# Altium PCB Node_PCB.PcbDoc
Units mm, origin at the board's own origin, x right, y up, seen from the top; angles counter-clockwise.
Board outline 90.25 x 90.17 mm, 2 copper layers (Top Layer, Bottom Layer); 52 components, 54 nets, 196 pads, 8 vias.
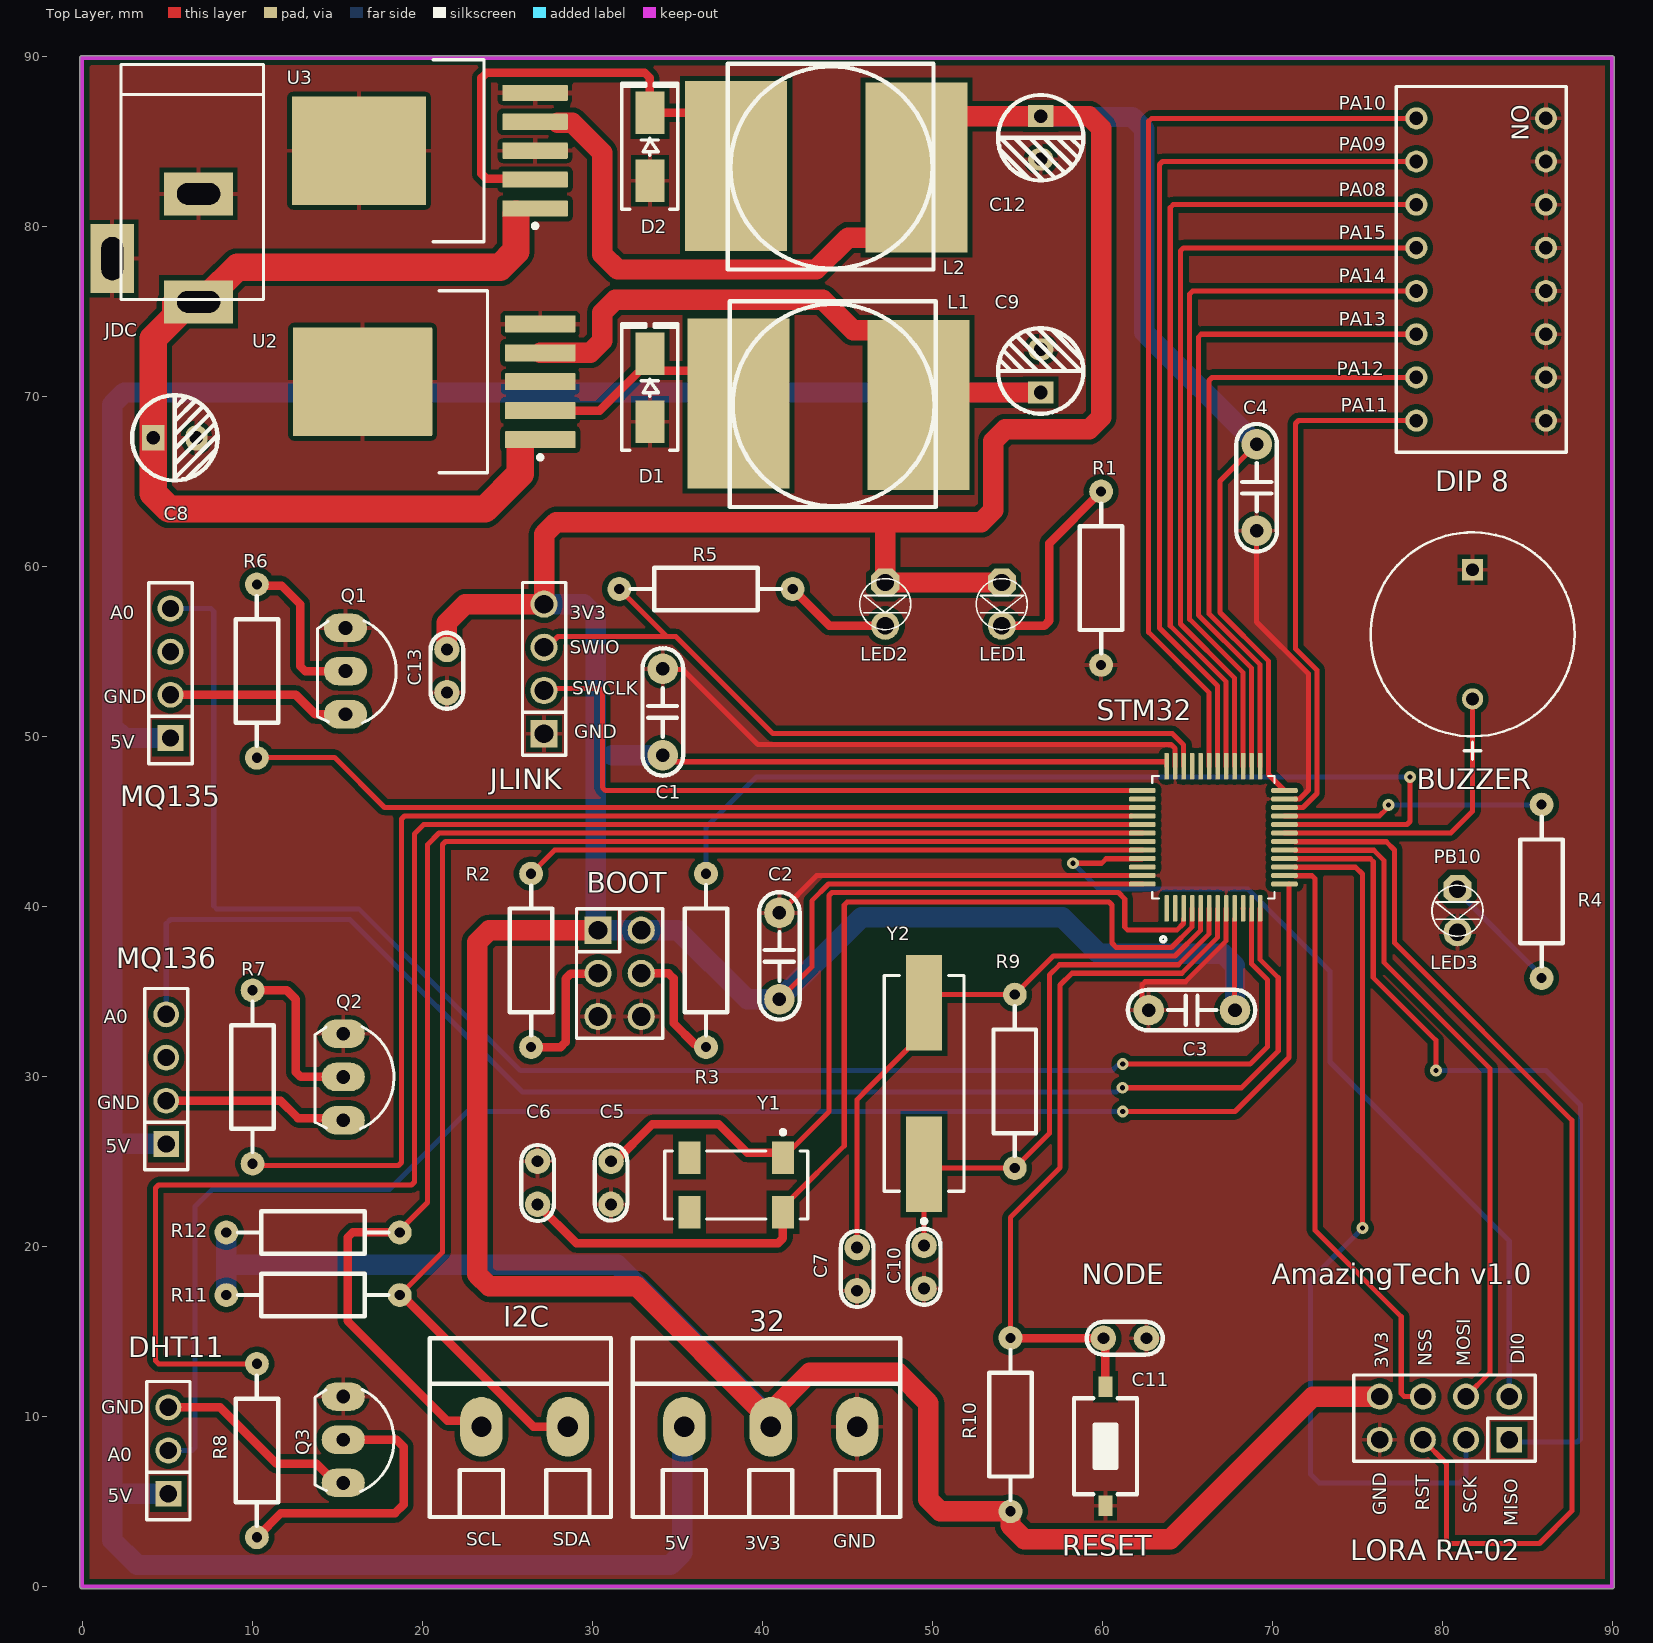
[diagram p0: Top Layer view]
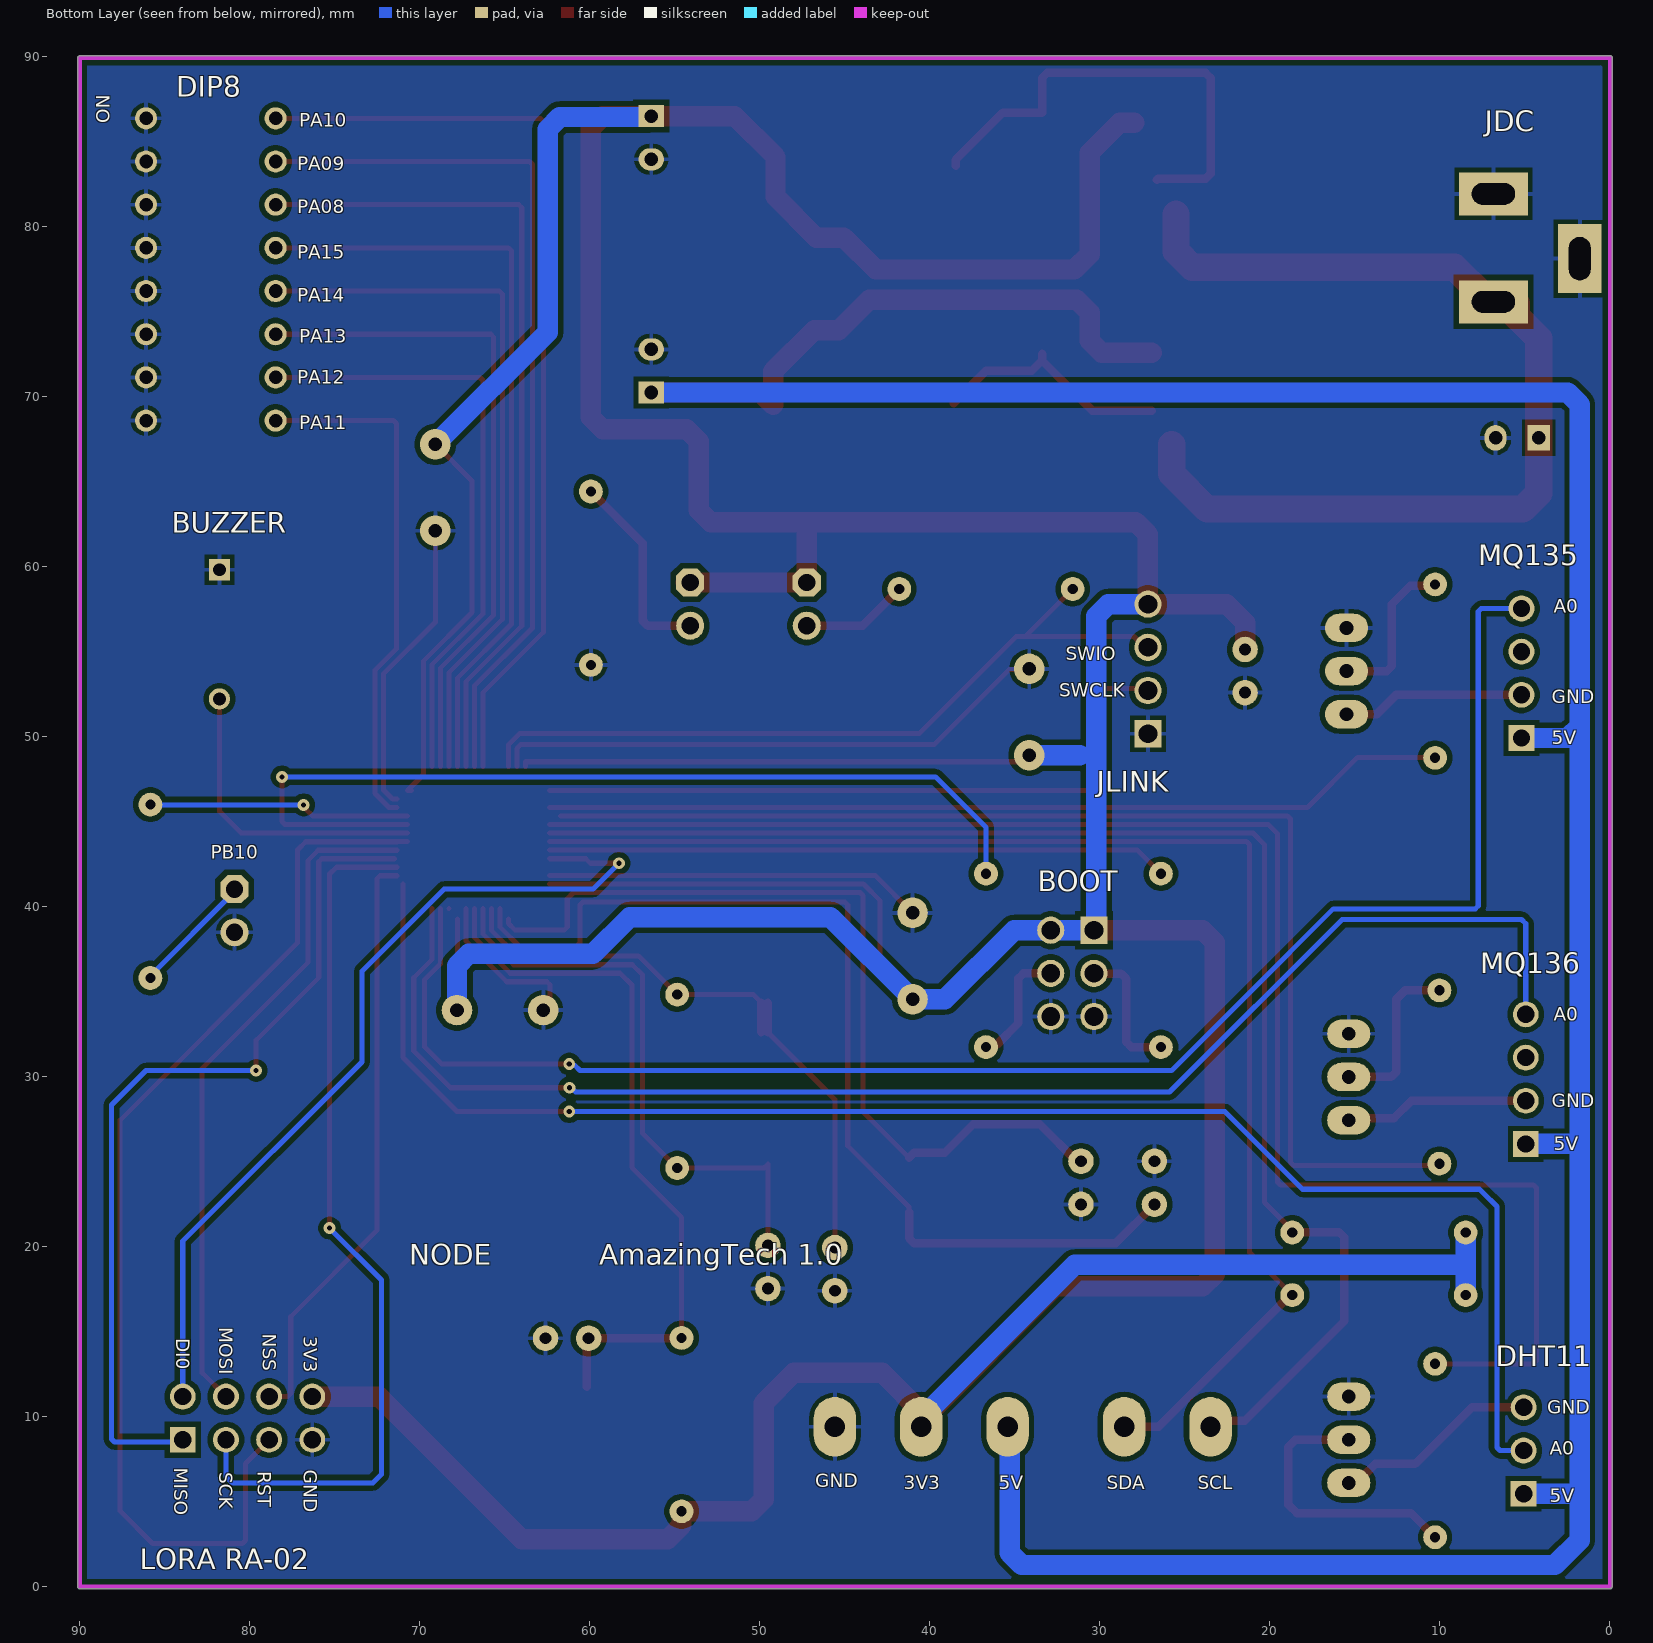
[diagram p1: Bottom Layer view, seen from below]

## Layer stack, top to bottom
Top Solder: solder mask 0.0102, Solder Resist, Dk 3.5
Top Layer: signal copper 0.0356
Dielectric 1: dielectric 0.32, FR-4, Dk 4.8
Bottom Layer: signal copper 0.0356
Bottom Solder: solder mask 0.0102, Solder Resist, Dk 3.5

## Board outline
0,-0.127 cw(c0,0) -0.127,0 -0.127,89.916 cw(c0,89.916) 0,90.043 90,90.027 cw(c90,89.9) 90.127,89.9 90.127,0 cw(c90,0) 90,-0.127

## Design rules (kind name [scope] priority, off if disabled: settings)
Clearance [All] p1: gap=0.31 ignorepadtopadclearanceinfootprint=FALSE
PolygonConnect [All] p1: connectstyle=Relief reliefconductorwidth=0.3 reliefentries=4 polygonreliefangle="90 Angle" airgapwidth=0.254
RoutingVias RoutingVias_1 [All] p1: holewidth=0.4 width=0.7 viastyle="Through Hole" minholewidth=0.4 minwidth=0.7 maxholewidth=0.4 maxwidth=0.7
SolderMaskExpansion [All] p1: expansion=0.102 istentingtop=FALSE
Width GND [InNet('GND')] p1: maxlimit=1.6 minlimit=0.3 preferedwidth=1.2
Width 3V3 [InNet('3V3')] p2: maxlimit=1.6 minlimit=0.3 preferedwidth=1.2
Width 5V [InNet('5V')] p3: maxlimit=1.6 minlimit=0.5 preferedwidth=1.2
Width 12V [InNet('12V')] p4: maxlimit=2 minlimit=1.2 preferedwidth=1.6
Width [All] p5: maxlimit=0.5 minlimit=0.3 preferedwidth=0.5
30 further rules are at their usual default settings.

## Components (designator, comment, footprint, x,y, rotation, side; value= is the part's Value field where it differs from the comment)
32 "KF128-3P" KF128-5.08-3P 35.433,9.398 r0 top (schematic designator J2)
BOOT "Header 3X2" "JP 2x3 DT" 31.623,36.068 r270 top (schematic designator P1)
BUZZER "Buzzer" FP-MCKPX-G1203A-K4056-MFG 81.788,56.007 r270 top (schematic designator LS1)
C1 "100nF" "tu tantalum dip5.08" 34.163,51.435 r90 top
C2 "100nF" "tu tantalum dip5.08" 41.021,37.084 r90 top
C3 "100nF" "tu tantalum dip5.08" 65.278,33.909 r180 top
C4 "100nF" "tu tantalum dip5.08" 69.088,64.643 r270 top
C5 "20pF" "tu gom" 31.115,23.749 r270 top
C6 "20pF" "tu gom" 26.797,23.749 r90 top
C7 "20pF" "tu gom" 45.593,18.669 r270 top
C8 "100uF" "tu hoa 5mm" 5.461,67.564 r0 top
C9 "100uF" "tu hoa 5mm" 56.388,71.501 r90 top
C10 "20pF" "tu gom" 49.53,18.796 r270 top
C11 "20pF" "tu gom" 61.341,14.605 r0 top
C12 "100uF" "tu hoa 5mm" 56.388,85.217 r270 top
C13 "20pF" "tu gom" 21.463,53.848 r270 top
D1 "SS34" "DIODE SMA" 33.401,70.517 r90 top
D2 "SS34" "DIODE SMA" 33.401,84.687 r90 top
DHT11 "DHT11" "JP 1x3 CT" 5.08,5.461 r90 top (schematic designator JP3)
"DIP 8" "418117270908" 418117270908 82.296,77.47 r270 top (schematic designator SW1)
I2C "KF128-2P" KF128-5.08-2P 23.495,9.398 r0 top (schematic designator J1)
JDC "Jac DC" DC-IN 4.318,78.74 r270 top (schematic designator JDC?)
JLINK "SWD" "JP 1x4 DT" 27.178,50.165 r90 top (schematic designator P2)
L1 "100uH - 3A SMD" "Cuon Cam 12x12x10" 50.208,63.496 r90 top
L2 "100uH - 3A SMD" "Cuon Cam 12x12x10" 50.081,77.466 r90 top
LED1 "LED 3mm" LED-3MM-RED 54.102,59.055 r270 top
LED2 "LED 3mm" LED-3MM-GREEN 47.244,59.055 r270 top
LED3 "LED 3mm" LED-3MM-RED 80.899,41.021 r270 top
"LORA RA-02" "Header - Lora" "JP 2x4 CT" 80.137,9.906 r180 top (schematic designator JP4)
MQ135 "MQ135" "JP 1x4 CT" 5.207,49.911 r90 top (schematic designator JP1)
MQ136 "MQ136" "JP 1x4 CT" 4.953,26.035 r90 top (schematic designator JP2)
Q1 "?" TO92 15.494,53.848 r270 top value=C9014
Q2 "?" TO92 15.367,29.972 r270 top value=C9014
Q3 "?" TO92 15.367,8.636 r270 top value=C9014
R1 "510R" "tro vach 1/4w" 59.944,59.309 r270 top
R2 "100k" "tro vach 1/4w" 26.416,36.83 r270 top
R3 "100k" "tro vach 1/4w" 36.703,36.83 r90 top
R4 "200R" "tro vach 1/4w" 85.852,40.894 r270 top
R5 "510R" "tro vach 1/4w" 36.703,58.674 r180 top
R6 "220R" "tro vach 1/4w" 10.287,53.848 r90 top
R7 "220R" "tro vach 1/4w" 10.033,29.972 r90 top
R8 "220R" "tro vach 1/4w" 10.287,8.001 r270 top
R9 "1M" "tro vach 1/4w" 54.864,29.718 r90 top
R10 "10k" "tro vach 1/4w" 54.61,9.525 r270 top
R11 "1.5k" "tro vach 1/4w" 13.589,17.145 r0 top
R12 "1.5k" "tro vach 1/4w" 13.589,20.828 r0 top
RESET "Nut Nhan 2 Chan SMD 3x6x2.5" "Nut Nhan 2 Chan SMD 3x6x2.5" 60.198,8.255 r90 top (schematic designator BT1)
STM32 "STM32F103C8T6" QFP50P900X900X160-48N 66.548,44.069 r90 top (schematic designator U1)
U2 "LM2576S-5.0/NOPB" KTT0005B_N 20.701,70.866 r180 top
U3 "LM2576SX-3.3/NOPB" KTT0005B_L 20.447,84.455 r180 top
Y1 "32.768K" FP-ABS25-MFG 38.481,23.622 r180 top
Y2 "8MHz" ABRA-ABLS-14.7456MHZ-B2-T_V 49.53,29.591 r90 top

## Footprints (in the part's own frame and the unit in brackets; to place one, negate y for a bottom-side part, rotate by r counter-clockwise, add the part's x,y. Pads: shape width x height; smd on the part's side, far side on the other; paste and mask are expansions set on the pad)
418117270908 [mm] "2.54 mm compact THT with raised actuator, 8p"
  round 1.3 hole 0.8: 1(-8.89,-3.81) 2(-6.35,-3.81) 3(-3.81,-3.81) 4(-1.27,-3.81) 5(1.27,-3.81) 6(3.81,-3.81) 7(6.35,-3.81) 8(8.89,-3.81) 9(8.89,3.81) 10(6.35,3.81) 11(3.81,3.81) 12(1.27,3.81) 13(-1.27,3.81) 14(-3.81,3.81) 15(-6.35,3.81) 16(-8.89,3.81)
  silkscreen extent -10.76,-5 10.76,5, body extent -10.66,-4.95 10.66,4.95, height 6.9
ABRA-ABLS-14.7456MHZ-B2-T_V [mm] "SMD, 2-Leads, Body 11.4x4.7mm"
  rect 5.6x2.1 smd: 1(-4.75,0) 2(4.75,0)
  silkscreen extent -8.22,-2.35 6.35,2.35, body extent -6.35,-2.35 6.35,2.35, height 4.16
"Cuon Cam 12x12x10" [mm] "Cuon Cam 12x12x10"
  rect 10x6 smd: 1(6.1,11.6) 2(6,1)
  silkscreen extent 0,0 12.1,12.1, body extent 0.1,-0.2 12.1,12.14, height 7.51
DC-IN [mil] "Jac DC input"
  rect 100x160 hole 50 slot 100 at 90 deg: 1(125,100) 2(-125,100)
  rect 160x100 hole 50 slot 100 at 0 deg: 3(25,-100)
  silkscreen extent -425,-80 120,250, body extent -410,-105 134,269, height 434
"DIODE SMA" [mm] "SMA"
  rect 2.5x1.7 smd: 1(-2,0) 2(2,0)
  silkscreen extent -3.68,-1.65 3.75,1.65, body extent -2.6,-1.37 2.6,1.37, height 2.4
FP-ABS25-MFG [mm]
  rect 1.3x1.9 smd paste+0 mask+0: 1(-2.75,-1.6) 2(2.75,-1.6) 3(2.75,1.6) 4(-2.75,1.6)
  silkscreen extent -4.2,-3.22 4.2,2, body extent -4.3,-2.65 4.3,2.65, height 0.25
FP-MCKPX-G1203A-K4056-MFG [mm]
  rect 1.25x1.25 hole 0.75 paste-1000 mask+0: 1(-3.8,0)
  round 1.25 hole 0.75 paste-1000 mask+0: 2(3.8,0)
  silkscreen extent -6,-6 7.35,6, body extent -6.1,-6.1 6.1,6.1, height 0.25
"JP 1x3 CT" [mm]
  rect 1.52x1.52 hole 1.02: 1(0,0)
  round 1.52 hole 1.02: 2(2.54,0) 3(5.08,0)
  silkscreen extent -1.52,-1.27 6.6,1.27, body extent -1.52,-1.25 6.6,1.25, height 8.51
"JP 1x4 CT" [mm]
  rect 1.52x1.52 hole 1.02: 1(0,0)
  round 1.52 hole 1.02: 2(2.54,0) 3(5.08,0) 4(7.62,0)
  silkscreen extent -1.52,-1.27 9.14,1.27, body extent -1.52,-1.25 9.14,1.25, height 8.51
"JP 1x4 DT" [mm] "4 pins, 1 row, straight, gold plating"
  rect 1.6x1.6 hole 1.1: 1(0,0)
  round 1.6 hole 1.1: 2(2.54,0) 3(5.08,0) 4(7.62,0)
  silkscreen extent -1.27,-1.27 8.89,1.27, body extent -1.27,-1.27 8.89,1.27, height 8.54
"JP 2x3 DT" [mm]
  rect 1.6x1.6 hole 1.1: 1(-2.54,-1.27)
  round 1.6 hole 1.1: 2(0,-1.27) 3(2.54,-1.27) 4(2.54,1.27) 5(0,1.27) 6(-2.54,1.27)
  silkscreen extent -3.81,-2.54 3.81,2.54, body extent -3.81,-2.54 3.81,2.54, height 8.55
"JP 2x4 CT" [mm] "8 pins, dual row, straight, gold plating"
  rect 1.52x1.52 hole 1.02: 1(-3.81,1.27)
  round 1.52 hole 1.02: 2(-1.27,1.27) 3(1.27,1.27) 4(3.81,1.27) 5(3.81,-1.27) 6(1.27,-1.27) 7(-1.27,-1.27) 8(-3.81,-1.27)
  silkscreen extent -5.33,-2.54 5.33,2.54, body extent -5.33,-2.54 5.33,2.54, height 8.51
KF128-5.08-2P [mm] "ÂÝ¶¤Ê½½ÓÏß¶Ë×Ó£¬½Å¾à5.08mm"
  oval 2.5x3.5 hole 1.2: 1(0,0) 2(5.08,0)
  silkscreen extent -3.05,-5.31 7.62,5.21, body extent -3.05,-5.38 7.61,5.12, height 14.15
KF128-5.08-3P [mm] "ÂÝ¶¤Ê½½ÓÏß¶Ë×Ó£¬½Å¾à5.08mm"
  oval 2.5x3.5 hole 1.2: 1(0,0) 2(5.08,0) 3(10.16,0)
  silkscreen extent -3.05,-5.31 12.7,5.21, body extent -3.05,-5.38 12.69,5.12, height 14.15
KTT0005B_L [mm] "DPAK, 5-Leads, Body 10.65x9.65mm, Pitch 1.7mm, IPC High Density"
  rrect11% 3.85x0.95 smd: 1(-6.2,3.4) 2(-6.2,1.7) 3(-6.2,0) 4(-6.2,-1.7) 5(-6.2,-3.4)
  rrect2% 7.9x6.4 smd: 6(4.15,0)
  silkscreen extent -6.33,-5.35 -0.2,5.35, body extent -3.2,-5.32 6.45,5.33, height 4.83
KTT0005B_N [mm] "DPAK, 5-Leads, Body 10.65x9.65mm, Pitch 1.7mm, IPC Medium Density"
  rrect10% 4.15x1 smd: 1(-6.25,3.4) 2(-6.25,1.7) 3(-6.25,0) 4(-6.25,-1.7) 5(-6.25,-3.4)
  rrect2% 8.2x6.4 smd: 6(4.2,0)
  silkscreen extent -6.38,-5.35 -0.3,5.35, body extent -3.15,-5.32 6.5,5.33, height 4.83
LED-3MM-GREEN [mil]
  oct 65x65 hole 40: 1(0,0)
  round 65 hole 40: 2(100,0)
  silkscreen extent -9,-59 109,59, body extent -15,-70 112,60, height 182
LED-3MM-RED [mil]
  oct 65x65 hole 40: 1(0,0)
  round 65 hole 40: 2(100,0)
  silkscreen extent -9,-59 109,59, body extent -27,-77 117,80, height 181
"Nut Nhan 2 Chan SMD 3x6x2.5" [mm] "Switch SMD type"
  rect 1.2x0.8 smd: 1(-3.5,0) 2(3.5,0)
  silkscreen extent -2.82,-1.85 2.82,1.85, body extent -3.05,-1.85 3.05,1.85, height 2.5
QFP50P900X900X160-48N [mm]
  rrect50% 1.56x0.28 smd: 1(-4.18,2.75) 2(-4.18,2.25) 3(-4.18,1.75) 4(-4.18,1.25) 5(-4.18,0.75) 6(-4.18,0.25) 7(-4.18,-0.25) 8(-4.18,-0.75) 9(-4.18,-1.25) 10(-4.18,-1.75) 11(-4.18,-2.25) 12(-4.18,-2.75) 25(4.18,-2.75) 26(4.18,-2.25) 27(4.18,-1.75) 28(4.18,-1.25) 29(4.18,-0.75) 30(4.18,-0.25) 31(4.18,0.25) 32(4.18,0.75) 33(4.18,1.25) 34(4.18,1.75) 35(4.18,2.25) 36(4.18,2.75)
  rrect50% 0.28x1.56 smd: 13(-2.75,-4.18) 14(-2.25,-4.18) 15(-1.75,-4.18) 16(-1.25,-4.18) 17(-0.75,-4.18) 18(-0.25,-4.18) 19(0.25,-4.18) 20(0.75,-4.18) 21(1.25,-4.18) 22(1.75,-4.18) 23(2.25,-4.18) 24(2.75,-4.18) 37(2.75,4.18) 38(2.25,4.18) 39(1.75,4.18) 40(1.25,4.18) 41(0.75,4.18) 42(0.25,4.18) 43(-0.25,4.18) 44(-0.75,4.18) 45(-1.25,4.18) 46(-1.75,4.18) 47(-2.25,4.18) 48(-2.75,4.18)
  silkscreen extent -6.15,-3.6 3.6,3.6, body extent -4.5,-4.5 4.5,4.5, height 1.6
TO92 [mil] "TO-92"
  oval 66x100 hole 32: 1(-100,0) 2(0,0) 3(100,0)
  silkscreen extent -117,-65 120,118, body extent -109,-66 109,95, height 245
"tro vach 1/4w" [mm]
  round 1.4 hole 0.6: 1(-5.1,0) 2(5.1,0)
  silkscreen extent -4.39,-1.25 4.42,1.25, body extent -5.38,-1.2 5.38,1.2, height 2.41
"tu gom" [mm] "Tu gom mini"
  round 1.5 hole 0.7: 1(-1.27,0) 2(1.27,0)
  silkscreen extent -2.25,-0.97 2.22,0.97, body extent -2.92,-0.85 2.92,0.85, height 6.12
"tu hoa 5mm" [mm]
  rect 1.3x1.5 hole 0.8: 1(-1.27,0)
  oval 1.3x1.5 hole 0.8: 2(1.27,0)
  silkscreen extent -2.51,-2.51 2.51,2.51, body extent -3.12,-3.18 3.23,3.18, height 14.55
"tu tantalum dip5.08" [mm]
  round 1.8 hole 0.8: 1(-2.54,0) 2(2.54,0)
  silkscreen extent -3.74,-1.2 3.76,1.2, body extent -2.82,-1.08 2.77,1.08, height 6.27

## Part data
BOOT: library part "JP 2x3 2.54 Duc Thang", "Cắm", Chung_Loai=Cắm, Don_Vi=Con, Ma_Hang=MH002686, Ten_Linh_Kien="Jump Đôi Đực 2.54MM 2x40P Thẳng 11MM"
BUZZER: library part CMP-12433-000001-1, "MAGNETIC BUZZER AND TRANSDUCER - More Details", Current=30mA, Frequency=2300Hz, Manufacturer="Multicomp Pro", Manufacturer Part Number=MCKPX-G1203A-K4056, Max Supply Voltage=5V, Min Supply Voltage=2V, Operating Supply Voltage=3V, Package=0, Temperature="-20°C to +70°C", Temperature Range High=+70°C, Temperature Range Low=-20°C, Automotive=No, Category=Speak, ComponentLink2Description=Datasheet, ComponentLink2URL=http://www.farnell.com/datasheets/1498149.pdf?_ga=2.17855225.1157923166.1572356775-536200964.1569240579, Device Class L1=Electromechanical, Device Class L2="Audio Products", Device Class L3=Buzzers, Height=9.5mm, Lead Free=Yes, Octopart=https://octopart.com/mckpx-g1203a-k4056-multicomp-12157154, RoHS=TRUE, Standoff Height=0.5mm
C1 C2 C3 C4: library part "Tu tantalum 100nF 50V 20% DIP5.08", "Cắm", Chung_Loai=Cắm, Don_Vi=Con, Ma_Hang=MH003955, So_Chan=2, Ten_Linh_Kien="Tụ tantalum 104-100nF 50V 20% DIP5.08 (sứ vàng)(10PCS)"
C5 C6 C7 C10 C11 C13: library part "Tu gom 20pF 50V", "Căm", Chung_Loai=Cắm, Don_Vi=Con, Ma_Hang=MH004768, So_Chan=2, Ten_Linh_Kien="Tụ gốm 20P 50V"
C8 C9 C12: library part "Tu Hoa 100uF 16V 5x7", "Cắm", Chung_Loai=Cắm, Don_Vi=Con, Ma_Hang=MH001347, So_Chan=2, Ten_Linh_Kien="Tụ Hóa 100uF 16V 5x7MM"
D1 D2: library part "Diode SS34 ( 1N5822 )", "Dán", Chung_Loai=Dán, Don_Vi=Con, Ma_Hang=MH002104, Ten_Linh_Kien="Diode SS34 3A 40V SMA ( 1N5822 SS34A)"
DHT11: library part "JP 1x3 2.54 Cai Thang", "Cắm", Chung_Loai=Cắm, Don_Vi=Con, Ma_Hang=MH004006, Ten_Linh_Kien="Jump Đơn Cái 2.54MM 1x20P Thẳng"
"DIP 8": "WS-DITV Compact THT Dip Switch, Raised Actuator, pitch 2.54mm, 8p", Manufacturer="Wurth Elektronik", Operating Temperature Max=85°C, Operating Temperature Min=-40°C, Rated Current Non-Switching=100mA, Rated Current Switching=25mA, Rated Voltage Non-Switching=50VDC, Rated Voltage Switching=24VDC, Actuator Type="Raise Type", Category="Dip Switches", ComponentLink1Description="Website Link", ComponentLink1URL=https://www.we-online.com/redexpert/article/418117270908?ad, ComponentLink2Description="Datasheet Link", ComponentLink2URL=https://www.we-online.com/redexpert/spec/418117270908?ad, Contact Material="Copper Alloy", Contact Plating=Gold, Manufacturer Part Number=418117270908, Match Code=WS-DITV, Mount="Through Hole", Number of Poles=8, Operation Force=800g, Packaging=Tube, Pitch=2.54mm
JDC: library part DCIN, "Jac DC input"
JLINK: library part "JP 1x4 2.54 Duc Thang", "Cắm", Chung_Loai=Cắm, Don_Vi=Con, Ma_Hang=MH000903, Ten_Linh_Kien="Jump Đơn Đực 2.54MM 1x40P Thẳng 11MM"
L1 L2: library part "CUON CAM 100uH SMD", "Dán", Chung_Loai=Dán, Don_Vi=Con, Ten_Linh_Kien="Cuộn Cảm 100uH 7x7x4MM CD74"
LED1 LED3: library part "LED 3mm Do", "Cắm", Chung_Loai=Cắm, Don_Vi=Con, Ma_Hang=MH003892, Ten_Linh_Kien="Led 3MM Phủ Đỏ (10c)"
LED2: library part "LED 3mm Xanh La", "Cắm", Chung_Loai=Cắm, Don_Vi=Con, Ma_Hang=MH001054, Ten_Linh_Kien="Led 3MM Phủ Xanh (10c)"
"LORA RA-02": library part "JP 2x4 2.54 Cai Thang", "Cắm", Chung_Loai=Cắm, Don_Vi=Con, Ma_Hang=MH008647, Ten_Linh_Kien="Jump Đôi Cái 2.54MM 2x20P Thẳng"
MQ135 MQ136: library part "JP 1x4 2.54 Cai Thang", "Cắm", Chung_Loai=Cắm, Don_Vi=Con, Ma_Hang=MH004006, Ten_Linh_Kien="Jump Đơn Cái 2.54MM 1x20P Thẳng"
Q1 Q2 Q3: library part "Trans 2N3904", "NPN transistor EBC"
R1 R5: library part "Tro Vach 1/4W 5% 510R", "Cắm", Chung_Loai=Cắm, Don_Vi=Con, Ma_Hang=MH007325, So_Chan=2, Ten_Linh_Kien="Trở Vạch 1/4w 5% 510R"
R2 R3: library part "Tro Vach 1/4W 5% 100k", "Cắm", Chung_Loai=Cắm, Don_Vi=Con, Ma_Hang=MH007352, So_Chan=2, Ten_Linh_Kien="Trở Vạch 1/4w 5% 100k"
R4: library part "Tro Vach 1/4W 5% 200R", "Cắm", Chung_Loai=Cắm, Don_Vi=Con, Ma_Hang=MH007296, So_Chan=2, Ten_Linh_Kien="Trở Vạch 1/4w 5% 200R"
R6 R7 R8: library part "Tro Vach 1/4W 5% 220R", "Cắm", Chung_Loai=Cắm, Don_Vi=Con, Ma_Hang=MH007300, So_Chan=2, Ten_Linh_Kien="Trở Vạch 1/4w 5% 220R"
R9: library part "Tro Vach 1/4W 5% 1M", "Cắm", Chung_Loai=Cắm, Don_Vi=Con, Ma_Hang=MH007392, So_Chan=2, Ten_Linh_Kien="Trở Vạch 1/4w 5% 1M"
R10: library part "Tro Vach 1/4W 1% 10k", "Cắm", Chung_Loai=Cắm, Don_Vi=Con, Ma_Hang=MH006349, So_Chan=2, Ten_Linh_Kien="Trở Vạch 1/4w 1% 10k"
R11 R12: library part "Tro Vach 1/4W 5% 1.5k", "Cắm", Chung_Loai=Cắm, Don_Vi=Con, Ma_Hang=MH007284, So_Chan=2, Ten_Linh_Kien="Trở Vạch 1/4w 5% 1.5k"
STM32: "ARM® Cortex®-M3 STM32F1 Microcontroller IC 32-Bit 72MHz 64KB (64K x 8) FLASH 48-LQFP (7x7)", Package="LQFP-48 STMicroelectronics", Check_prices=https://www.snapeda.com/parts/STM32F103C8T6/STMicroelectronics/view-part/?ref=eda, MF=STMicroelectronics, MP=STM32F103C8T6, SnapEDA_Link=https://www.snapeda.com/parts/STM32F103C8T6/STMicroelectronics/view-part/?ref=snap
U2: library part CMP-0069-00114-3, "SIMPLE SWITCHER® 3A Step-Down Voltage Regulator, 5-pin TO-263, Pb-Free", Manufacturer="Texas Instruments", PackageTopMarking="NSUZXYTTE#*LM2576S*-5.0 P+", PowerWise=N, Code_JEDEC=MO-169-AB, ComponentLink1Description="Datasheet URL", ComponentLink1URL=http://www.ti.com/general/docs/lit/getliterature.tsp?genericPartNumber=LM2576&fileType=pdf, CompType=Switcher, PackageDescription="TO-263, Molded, .400 x .390 x .180in, 5 Lead, .067in Pitch, Surface Mount", PackageReference=KTT0005B, PinCount=5, RoHS=Y
U3: library part CMP-0069-00110-3, "SIMPLE SWITCHER® 3A Step-Down Voltage Regulator, 5-pin TO-263, Pb-Free", Manufacturer="Texas Instruments", PackageTopMarking="NSUZXYTTE#*LM2576S*-3.3 P+", PowerWise=N, Code_JEDEC=MO-169-AB, ComponentLink1Description="Datasheet URL", ComponentLink1URL=http://www.ti.com/general/docs/lit/getliterature.tsp?genericPartNumber=LM2576&fileType=pdf, CompType=Switcher, PackageDescription="TO-263, Molded, .400 x .390 x .180in, 5 Lead, .067in Pitch, Surface Mount", PackageReference=KTT0005B, PinCount=5, RoHS=Y
Y1: library part CMP-2000-05037-2, "CRYSTAL 32.7680KHZ 12.5PF SMD", Case/Package=SMD/SMT, ESR (Equivalent Series Resistance)=50kR, Frequency=32.768kHz, Frequency Tolerance=20ppm, Load Capacitance=12.5pF, Max Operating Temperature=85°C, Min Operating Temperature=-40°C, Operating Frequency="32.768 kHz", Package Quantity=1000, Depth=3.8mm, Height=0.098inch, Lead Free="Lead Free", Length=8mm, Mount="Surface Mount", Number of Pins=4, Packaging="Tape and Reel", Radiation Hardening=No, REACH SVHC="No SVHC", RoHS Compliant=Yes, Series=ABS25, Series Resistance=50kR, Termination=SMD/SMT, Tolerance=20ppm, Width=3.8mm
Y2: library part CMP-2000-05726-1, "Low Profile Crystal, 8.0 MHz, +/- 30 ppm, -20 to 70 degC, 2-Pin SMD, RoHS, Tape and Reel", Case Height=4.2mm, Case Length=11.4mm, Case Width=4.7mm, Frequency Stability=50PPM, Load Capacitance=18pF, Manufacturer=ABRACON, Operating Temperature Range=-20Cto+70C, Package / Case=HC-49/US, Package Description="2-Pin Surface Mount Device, Body 11.4 x 4.7 mm", Package Reference=ABLS-14.7456MHZ-B2-T, Tolerance=30PPM, Brand=ABRACON, Datasheet URL=http://www.abracon.com/Resonators/abls.pdf, Datasheet Version=04/2011, Dimensions=4.7mmWx11.4mmLx4.2mmH, ESR=80Ohms, Factory Pack Quantity=1000, Frequency=8MHz, Manufacturer URL=http://www.abracon.com/, Mounting Style=SMD/SMT, Mounting Technology=SurfaceMount, Package URL=http://www.abracon.com/Support/PackageDrawing/Resonators/ABLS-2D.pdf, Packaging=Reel, Product Category=Crystals, RoHS=Details, Series=ABLS, Termination Style=SMD/SMT, Type=LowProfileMicroprocessorCrystal
RESET: Ma_Hang=MH001036, Ten="Nút Nhấn 2 Chân 3x6x2.5MM SMD"

## Via types
v1: diameter 0.7, hole 0.3, Top Layer to Bottom Layer, 8 vias

## Nets (pads, with @x,y where several pads share a name; then routed paths per layer and width w, separated by ;. In a path a pad name is that pad's centre, name@x,y a point inside that pad or via, vN(x,y) a via of type N, cw(c..) or ccw(c..) an arc to the next point about the centre after c; other vN are vias at no path point)
3V3: 32.2 "LORA RA-02.5" BOOT.1 BOOT.6 C1.1 C2.1 C3.1 C4.1 C12.1 C13.1 JLINK.4 L2.2 LED1.1 LED2.1 R10.2 R11.1 R12.1 STM32.9 STM32.24 STM32.36 STM32.48 U3.4 | length 439.3
  Top Layer w0.3: C1.1@34.163,48.514 63.788,48.514 63.798,48.504 STM32.36 ; C2.1 42.926,36.449 42.926,40.334 43.911,41.319 STM32.48 ; STM32.9@67.798,39.259 67.798,33.929 C3.1 ; C4.1 66.929,65.024 66.929,57.294 69.798,54.425 69.798,48.042 69.788,48.032 69.788,47.759 STM32.24 70.495,46.819 STM32.24@70.485,46.829
  Top Layer w1.2: C13.1 21.463,56.701 22.547,57.785 JLINK.4 27.178,61.908 27.881,62.611 47.244,62.611 ; U3.4@27.972,86.106 28.829,86.106 30.607,84.328 30.607,78.359 31.496,77.47 43.18,77.47 45.056,79.346 46.681,79.346 49.081,81.746 L2.2 49.081,84.087 51.481,86.487 C12.1 59.241,86.487 59.944,85.784 59.944,68.775 59.241,68.072 54.297,68.072 53.594,67.369 53.594,63.314 52.891,62.611 47.244,62.611 ; BOOT.1 23.944,38.608 23.241,37.905 23.241,18.356 23.944,17.653 32.631,17.653 32.2@40.259,10.025 ; 32.2@40.259,9.525 32.2@40.259,10.025 ; LED2.1 LED1.1 LED1.1@54.356,59.055 ; LED2.1@47.244,59.563 47.244,62.611 ; 76.327,11.176 72.39,11.176 64.008,2.794 55.413,2.794 54.61,3.597 R10.2 50.487,4.425 49.784,5.128 49.784,10.795 48.006,12.573 42.807,12.573 32.2@40.259,10.025
  Bottom Layer w1.2: R11.1 8.489,18.923 ; R12.1 8.489,18.923 ; JLINK.4 29.523,57.785 30.226,57.082 BOOT.1@30.226,39.218 ; BOOT.1 BOOT.6 35.052,38.608 39.116,34.544 C2.1 45.847,39.37 57.658,39.37 59.817,37.211 67.115,37.211 67.818,36.508 C3.1 ; 31.198,48.895 C1.1 ; 32.2 40.513,9.898 31.488,18.923 8.489,18.923 ; C12.1 56.438,86.437 61.772,86.437 62.484,85.725 62.484,73.787 C4.1
5V: 32.1 C9.1 DHT11.1 L1.2 MQ135.1 MQ136.1 U2.4 | length 209.6
  Top Layer w1.2: U2.4 29.904,72.566 30.607,73.269 30.607,74.93 31.369,75.692 43.561,75.692 45.357,73.896 46.808,73.896 49.208,71.496 L1.2 49.943,70.231 C9.1
  Bottom Layer w1.2: MQ136.1 1.778,26.035 ; DHT11.1 1.905,5.461 1.778,5.334 ; MQ135.1 2.481,49.911 1.778,50.614 ; 32.1 35.306,9.271 35.306,1.973 34.603,1.27 3.243,1.27 1.778,2.735 1.778,5.334 ; C9.1 2.481,70.231 1.778,69.528 1.778,50.614 ; 1.778,5.334 1.778,26.035 ; 1.778,26.035 1.778,50.614
12V: C8.1 JDC.1 U2.1 U3.1 | length 59.7
  Top Layer w1.6: U3.1@25.522,80.73 25.522,78.534 24.585,77.597 9.144,77.597 7.493,75.946 6.731,75.946 5.969,75.946 5.499,75.476 5.499,74.714 4.191,73.406 C8.1 4.191,64.31 5.128,63.373 23.701,63.373 25.781,65.453 U2.1@25.781,67.166
BOOT0: R2.1 STM32.44 | length 36.5
  Top Layer w0.3: R2.1 27.805,43.319 STM32.44
BOOT1: R3.2 STM32.20 | length 55.4
  Top Layer w0.3: STM32.20 77.929,44.819 78.105,44.995 v1(78.105,47.625)
  Bottom Layer w0.3: R3.2 36.703,44.655 39.673,47.625 v1(78.105,47.625)
D0: "LORA RA-02.8" STM32.45 | length 51.4
  Top Layer w0.3: v1(58.293,42.545) 59.976,42.545 60.24,42.809 62.358,42.809 STM32.45 ; 83.947,11.176 83.947,11.303
  Bottom Layer w0.3: v1(58.293,42.545) 59.817,41.021 68.58,41.021 73.406,36.195 73.406,30.861 83.947,20.32 83.947,11.176
GND: 32.3 "DIP 8.9" "DIP 8.10" "DIP 8.11" "DIP 8.12" "DIP 8.13" "DIP 8.14" "DIP 8.15" "DIP 8.16" "LORA RA-02.4" BOOT.3 BOOT.4 BUZZER.1 C1.2 C2.2 C3.2 C4.2 C5.2 C6.2 C7.2 C8.2 C9.2 C10.2 C11.2 C12.2 C13.2 D1.1 D2.1 JDC.2 JDC.3 JLINK.1 LED3.2 Q1.1 Q2.1 Q3.1 R1.2 RESET.1 STM32.8 STM32.23 STM32.35 STM32.47 U2.3 U2.5 U2.6 U3.3 U3.5 U3.6 | length 82.7
  Top Layer w0.3: C1.2 34.194,53.944 35.337,53.944 39.751,49.53 64.063,49.53 64.288,49.305 64.288,48.879 64.298,48.869 STM32.35 ; C2.2 43.216,41.819 STM32.47 ; C3.2@62.357,33.519 62.357,35.4 62.533,35.576 64.894,35.576 67.298,37.98 STM32.8 ; C4.2 69.088,56.737 72.136,53.689 72.136,50.673 72.136,46.853 71.612,46.329 STM32.23@71.358,46.329
MISO: "LORA RA-02.1" STM32.16 | length 51.6
  Top Layer w0.3: STM32.16@71.501,42.809 75.77,42.809 75.946,42.633 75.946,35.814 79.629,32.131 v1(79.629,30.353)
  Bottom Layer w0.3: v1(79.629,30.353) 86.106,30.353 88.138,28.321 88.138,8.685 87.962,8.509 84.074,8.509 83.947,8.636
MOSI: "LORA RA-02.7" STM32.17 | length 40.2
  Top Layer w0.3: STM32.17@71.358,43.309 75.977,43.309 76.589,42.697 76.589,36.695 82.804,30.48 82.804,12.573 81.407,11.176
NetD1_2: D1.2 L1.1 U2.2 | length 14.3
  Top Layer w0.5: U2.2 30.45,69.166 D1.2@33.401,72.117 ; D1.2 D1.2@33.401,72.117 ; L1.1 36.687,71.517 34.001,71.517 D1.2@33.401,72.117
NetD2_2: D2.2 L2.1 U3.2 | length 27.7
  Top Layer w0.5: U3.2 26.598,82.804 23.788,82.804 23.495,83.097 23.495,88.734 23.788,89.027 33.108,89.027 33.401,88.734 D2.2 35.731,86.687 38.481,83.937 L2.1
NetJP1_2: MQ135.2 Q1.3 | length 10.8
  Top Layer w0.5: MQ135.2 12.573,52.451 13.716,51.308 Q1.3
NetJP2_2: MQ136.2 Q2.3 | length 10.9
  Top Layer w0.5: MQ136.2 11.684,28.575 12.7,27.559 15.24,27.559 Q2.3
NetJP3_3: DHT11.3 Q3.3 | length 12.5
  Top Layer w0.5: DHT11.3 8.128,10.541 11.455,7.214 13.807,7.214 14.925,6.096 Q3.3@15.748,6.096
NetLED1_2: LED1.2 R1.1 | length 11.8
  Top Layer w0.5: LED1.2 56.603,56.515 56.896,56.808 56.896,61.361 R1.1
NetLED2_2: LED2.2 R5.1 | length 6.3
  Top Layer w0.5: R5.1 43.962,56.515 LED2.2
NetLED3_1: LED3.1 R4.2 | length 7.3
  Bottom Layer w0.3: LED3.1 80.899,40.884 85.852,35.931 R4.2
NetP1_2: BOOT.2 R2.2 | length 7.9
  Top Layer w0.5: R2.2 28.155,31.73 28.448,32.023 28.448,35.749 28.741,36.042 30.327,36.042 BOOT.2
NetP1_5: BOOT.5 R3.1 | length 7.1
  Top Layer w0.5: BOOT.5 34.505,36.068 34.798,35.775 34.798,33.147 36.043,31.902 36.531,31.902 R3.1
NetQ1_2: Q1.2 R6.2 | length 9.5
  Top Layer w0.5: R6.2 10.36,58.875 11.737,58.875 12.827,57.785 12.827,54.141 13.12,53.848 Q1.2
NetQ2_2: Q2.2 R7.2 | length 10
  Top Layer w0.5: R7.2 12.045,35.072 12.573,34.544 12.573,30.265 12.866,29.972 Q2.2
NetQ3_2: Q3.2 R8.2 | length 16.6
  Top Layer w0.5: R8.2 11.704,4.318 18.415,4.318 18.923,4.826 18.923,8.216 18.503,8.636 Q3.2
NSS: "LORA RA-02.6" STM32.14 | length 35
  Top Layer w0.3: STM32.14@71.358,41.809 72.341,41.809 72.517,41.633 72.517,20.955 77.597,15.875 77.597,11.352 77.773,11.176 78.867,11.176
OSCIN: C7.1 R9.2 STM32.5 Y2.2 | length 36.7
  Top Layer w0.3: C7.1 45.593,28.654 46.228,29.289 Y2.2@49.53,32.591 ; Y2.2@49.911,34.341 50.388,34.818 R9.2 57.13,37.084 64.281,37.084 65.798,38.601 STM32.5
  Top Layer w0.5: Y2.2@49.53,32.591 Y2.2 ; Y2.2@49.911,32.591 Y2.2@49.911,34.341
OSCOUT: C10.1 R9.1 STM32.6 Y2.1 | length 34.3
  Top Layer w0.3: C10.1 Y2.1 49.753,24.618 R9.1 56.896,26.65 56.896,35.967 57.505,36.576 64.48,36.576 66.298,38.394 STM32.6
PA0: STM32.10 | length 0
PA1: MQ135.4 STM32.11 | length 95.1
  Top Layer w0.3: v1(61.214,30.734) 68.707,30.734 69.723,31.75 69.723,35.687 68.798,36.612 STM32.11
  Bottom Layer w0.3: MQ135.4 7.571,57.531 7.747,57.355 7.747,40.038 7.923,39.863 16.271,39.863 21.336,34.798 25.781,30.353 60.584,30.353 60.889,30.657 61.137,30.657 v1@61.29,30.81
PA2: MQ136.4 STM32.12 | length 84.9
  Top Layer w0.3: v1(61.193,29.337) 68.199,29.337 70.358,31.496 70.358,35.814 69.298,36.874 STM32.12
  Bottom Layer w0.3: MQ136.4 4.953,38.989 5.207,39.243 15.748,39.243 25.908,29.083 60.83,29.083 61.084,29.337 v1(61.193,29.337)
PA3: DHT11.2 STM32.13 | length 94
  Top Layer w0.3: v1(61.214,27.94) 67.818,27.94 70.993,31.115 70.993,41.309 STM32.13@70.983,41.319
  Bottom Layer w0.3: DHT11.2 6.477,8.001 6.653,8.177 6.653,22.352 7.493,23.192 7.669,23.368 18.083,23.368 22.352,27.637 22.655,27.94 v1(61.214,27.94)
PA8: "DIP 8.3" STM32.29 | length 48.8
  Top Layer w0.3: STM32.29 67.298,53.225 64.008,56.515 64.008,81.104 64.184,81.28 78.486,81.28
PA9: "DIP 8.2" STM32.30 | length 52
  Top Layer w0.3: STM32.30 66.798,52.963 63.373,56.388 63.373,83.644 63.549,83.82 78.486,83.82
PA10: "DIP 8.1" STM32.31 | length 55.2
  Top Layer w0.3: STM32.31@66.296,48.251 STM32.31 66.298,52.574 62.738,56.134 62.738,86.184 62.914,86.36 78.486,86.36
PA11: STM32.32
PA12: STM32.33
PB1: BUZZER.2 STM32.19 | length 18.5
  Top Layer w0.3: STM32.19 80.504,44.319 81.788,45.603 BUZZER.2@81.788,52.541
PB3: R6.1 STM32.39 | length 53.3
  Top Layer w0.3: R6.1 10.307,48.768 14.859,48.768 17.798,45.829 62.358,45.829 STM32.39
PB4: R7.1 STM32.40 | length 72.1
  Top Layer w0.3: R7.1 10.14,24.765 18.62,24.765 18.796,24.941 18.796,45.143 18.972,45.319 STM32.40@61.738,45.319
PB5: R8.1 STM32.41 | length 95.1
  Top Layer w0.3: R8.1 4.494,13.101 4.318,13.277 4.318,23.446 4.494,23.622 19.382,23.622 19.558,23.798 19.558,44.274 20.103,44.819 STM32.41
PB9: STM32.46
PB10: R4.1 STM32.21 | length 15.2
  Top Layer w0.3: STM32.21 76.307,45.319 v1@76.708,45.72
  Bottom Layer w0.3: v1(76.835,45.974) 85.832,45.974 R4.1
PB11: "DIP 8.8" STM32.22 | length 31.1
  Top Layer w0.3: STM32.22@71.358,45.829 71.419,45.829 71.819,45.829 72.636,46.646 72.636,53.897 71.374,55.159 71.374,68.404 71.55,68.58 78.486,68.58
PB12: "DIP 8.7" STM32.25 | length 36.2
  Top Layer w0.3: STM32.25 69.298,54.218 66.294,57.222 66.294,70.944 66.47,71.12 78.486,71.12
PB13: "DIP 8.6" STM32.26 | length 39.4
  Top Layer w0.3: STM32.26 68.798,54.011 65.659,57.15 65.659,73.484 65.835,73.66 78.486,73.66
PB14: "DIP 8.5" STM32.27 | length 42.5
  Top Layer w0.3: STM32.27 68.298,53.749 65.151,56.896 65.151,76.024 65.327,76.2 78.486,76.2
PB15: "DIP 8.4" STM32.28 | length 45.6
  Top Layer w0.3: STM32.28 67.798,53.432 64.616,56.615 64.616,78.564 64.791,78.74 78.486,78.74
PC14: C5.1 STM32.3 Y1.1 | length 51.6
  Top Layer w0.3: Y1.1 41.381,25.372 43.053,27.044 43.942,27.933 43.942,40.643 44.118,40.819 60.96,40.819 61.333,40.446 61.333,38.784 61.509,38.608 64.391,38.608 64.788,39.005 STM32.3@64.788,39.259
  Top Layer w0.5: C5.1 31.369,25.019 33.528,27.178 37.465,27.178 39.116,25.527 40.926,25.527 Y1.1
PC15: C6.1 STM32.4 Y1.4 | length 61.1
  Top Layer w0.3: Y1.4 41.231,22.322 41.731,22.822 44.831,25.922 44.831,40.083 45.007,40.259 60.403,40.259 60.579,40.083 60.579,37.846 60.833,37.592 64.082,37.592 65.298,38.808 STM32.4
  Top Layer w0.5: C6.1 29.083,20.193 40.938,20.193 41.231,20.486 Y1.4
RESET: C11.1 R10.1 RESET.2 STM32.7 | length 42.5
  Top Layer w0.3: R10.1 54.61,21.717 57.531,24.638 57.531,35.384 58.223,36.076 64.687,36.076 66.798,38.187 STM32.7 ; C11.1@60.061,14.615 C11.1
  Top Layer w0.5: R10.1 54.62,14.615 C11.1@60.061,14.615 ; C11.1 60.198,14.478 RESET.2
RST: "LORA RA-02.3" STM32.18 | length 64.6
  Top Layer w0.3: STM32.18 71.348,43.819 71.358,43.809 76.714,43.809 77.199,43.324 77.199,37.863 87.63,27.432 87.63,4.445 85.725,2.54 80.44,2.54 80.264,2.716 80.264,7.239 78.867,8.636
SCK: "LORA RA-02.2" STM32.15 | length 52.4
  Top Layer w0.3: STM32.15@71.358,42.309 74.908,42.309 75.311,41.906 v1(75.311,21.082)
  Bottom Layer w0.3: v1(75.311,21.082) 72.263,18.034 72.263,6.604 72.771,6.096 81.026,6.096 81.407,6.477 81.407,8.636
SCL: I2C.1 R12.2 STM32.42 | length 84.8
  Top Layer w0.3: R12.2@18.562,20.828 20.32,22.586 20.32,43.639 21,44.319 STM32.42 ; I2C.1 I2C.1@23.495,9.898
  Top Layer w0.5: R12.2@18.562,20.828 15.914,20.828 15.621,20.535 15.621,15.621 21.495,9.747 23.146,9.747 I2C.1
SDA: I2C.2 R11.2 STM32.43 | length 82.4
  Top Layer w0.3: R11.2 21.209,19.665 21.209,43.643 21.385,43.819 STM32.43 ; I2C.2 I2C.2@28.575,9.898
  Top Layer w0.5: R11.2 18.808,17.145 26.555,9.398 I2C.2
SWCLK: JLINK.2 STM32.37 | length 41
  Top Layer w0.3: JLINK.2 27.305,52.832 30.431,52.832 30.607,52.656 30.607,46.995 30.783,46.819 STM32.37
SWIO: JLINK.3 R5.2 STM32.34 | length 45.7
  Top Layer w0.3: JLINK.3 27.369,55.245 28.004,55.88 34.397,55.88 ; R5.2 34.397,55.88 ; STM32.34 64.798,49.502 64.135,50.165 40.64,50.165 34.925,55.88 34.397,55.88
pads on no net: MQ135.3 MQ136.3 STM32.1 STM32.2 STM32.38 Y1.2 Y1.3

## Polygon pours and split planes (outlines as drawn)
GND on Top Layer "GND_L01_P001" (solid, remove dead copper, pour order 1): 90.043,0 -0.127,0 -0.127,89.789 0.127,90.043 90.043,90.043
GND on Bottom Layer "GND_L02_P002" (solid, remove dead copper, pour order 2): 90.043,0.127 89.916,0 -0.127,0 -0.127,89.789 0,89.916 90.043,89.916

## Keep-outs
Keep-Out Layer:
  lines w0.254: 0,0 0,89.916 90,89.9 90,0 0,0

## Other copper
Top Layer:

## Silkscreen, mask and mechanical layers (free items; w line width, h text height)
Top Overlay:
  text "PA10" at 73.914,86.868 h0.8
  text "PA09" at 73.914,84.455 h0.8
  text "PA08" at 73.914,81.788 h0.8
  text "PA15" at 73.914,79.248 h0.8
  text "PA14" at 73.914,76.708 h0.8
  text "PA13" at 73.914,74.168 h0.8
  text "PA12" at 73.787,71.247 h0.8
  text "PA11" at 74.041,69.088 h0.8
  text "A0" at 1.651,56.896 h0.8
  text "3V3" at 28.702,56.896 h0.8
  text "SWIO" at 28.702,54.864 h0.8
  text "SWCLK" at 28.829,52.451 h0.8
  text "GND" at 1.27,51.943 h0.8
  text "GND" at 28.956,49.911 h0.8
  text "5V" at 1.651,49.276 h0.8
  text "PB10" at 79.502,42.545 h0.8
  text "A0" at 1.27,33.147 h0.8
  text "GND" at 0.889,28.067 h0.8
  text "5V" at 1.397,25.527 h0.8
  text "NODE            AmazingTech v1.0" at 58.801,17.78 h1.2
  text "DI0" at 84.836,13.081 h0.8 r90
  text "NSS" at 79.375,12.954 h0.8 r90
  text "MOSI" at 81.661,12.954 h0.8 r90
  text "3V3" at 76.835,12.827 h0.8 r90
  text "GND" at 1.143,10.16 h0.8
  text "A0" at 1.524,7.366 h0.8
  text "5V" at 1.524,4.953 h0.8
  text "RST" at 79.248,4.445 h0.8 r90
  text "SCK" at 82.042,4.318 h0.8 r90
  text "GND" at 76.708,4.191 h0.8 r90
  text "MISO" at 84.455,3.556 h0.8 r90
  text "SCL" at 22.606,2.413 h0.8
  text "SDA" at 27.686,2.413 h0.8
  text "GND" at 44.196,2.286 h0.8
  text "5V" at 34.29,2.159 h0.8
  text "3V3" at 38.989,2.159 h0.8
Bottom Overlay:
  text "NO" at 89.027,87.757 h0.8 r90
  text "DIP8" at 84.328,87.63 h1.2
  text "PA10" at 77.089,85.852 h0.8
  text "JDC" at 7.366,85.598 h1.2
  text "PA09" at 77.216,83.312 h0.8
  text "PA08" at 77.216,80.772 h0.8
  text "PA15" at 77.216,78.105 h0.8
  text "PA14" at 77.216,75.565 h0.8
  text "PA13" at 77.089,73.152 h0.8
  text "PA12" at 77.216,70.739 h0.8
  text "PA11" at 77.089,68.072 h0.8
  text "BUZZER" at 84.582,61.976 h1.2
  text "MQ135" at 7.747,60.071 h1.2
  text "A0" at 3.302,57.277 h0.8
  text "SWIO" at 32.004,54.483 h0.8
  text "SWCLK" at 32.385,52.324 h0.8
  text "GND" at 3.429,51.943 h0.8
  text "5V" at 3.429,49.53 h0.8
  text "JLINK" at 30.197,46.741 h1.2
  text "PB10" at 82.296,42.799 h0.8
  text "BOOT" at 33.655,40.894 h1.2
  text "MQ136" at 7.62,36.068 h1.2
  text "A0" at 3.302,33.274 h0.8
  text "GND" at 3.429,28.194 h0.8
  text "5V" at 3.302,25.654 h0.8
  text "NODE            AmazingTech 1.0" at 70.612,18.923 h1.2
  text "MOSI" at 81.788,15.24 h0.8 r90
  text "NSS" at 79.248,14.859 h0.8 r90
  text "3V3" at 76.835,14.732 h0.8 r90
  text "DI0" at 84.328,14.605 h0.8 r90
  text "DHT11" at 6.731,12.954 h1.2
  text "GND" at 3.683,10.16 h0.8
  text "A0" at 3.556,7.747 h0.8
  text "MISO" at 84.455,6.985 h0.8 r90
  text "GND" at 76.835,6.858 h0.8 r90
  text "RST" at 79.541,6.791 h0.8 r90
  text "SCK" at 81.788,6.731 h0.8 r90
  text "GND" at 46.736,5.842 h0.8
  text "SCL" at 24.257,5.715 h0.8
  text "SDA" at 29.591,5.715 h0.8
  text "5V" at 35.941,5.715 h0.8
  text "3V3" at 41.529,5.715 h0.8
  text "5V" at 3.556,4.953 h0.8
  text "LORA RA-02" at 86.487,1.016 h1.2
Bottom Assembly:
  text "LED3" at 79.629,42.037 h0.8

## Text inside footprints (layer, text, board x,y; h text height)
"DIP 8": Top Overlay "ON" at 84.096,87.16 h1.02 r270; Top Component Outline "6" at 79.496,74.03 h1.02 r270; Top Component Outline "2" at 79.496,84.19 h1.02 r270; Top Component Outline "ON" at 84.096,87.16 h1.02 r270; Top Component Outline "1" at 79.496,86.59 h1.02 r270; Top Component Outline "3" at 79.496,81.65 h1.02 r270; Top Component Outline "4" at 79.496,79.11 h1.02 r270; Top Component Outline "5" at 79.496,76.57 h1.02 r270; Top Component Outline "7" at 79.496,71.49 h1.02 r270; Top Component Outline "8" at 79.496,68.95 h1.02 r270